# Altium PCB Relay Control PCB.PcbDoc
Units mil, origin at the board's own origin, x right, y up, seen from the top; angles counter-clockwise.
Board outline 2085 x 1860 mil, 2 copper layers (Top Layer, Bottom Layer); 11 components, 8 nets, 27 pads, 0 vias.
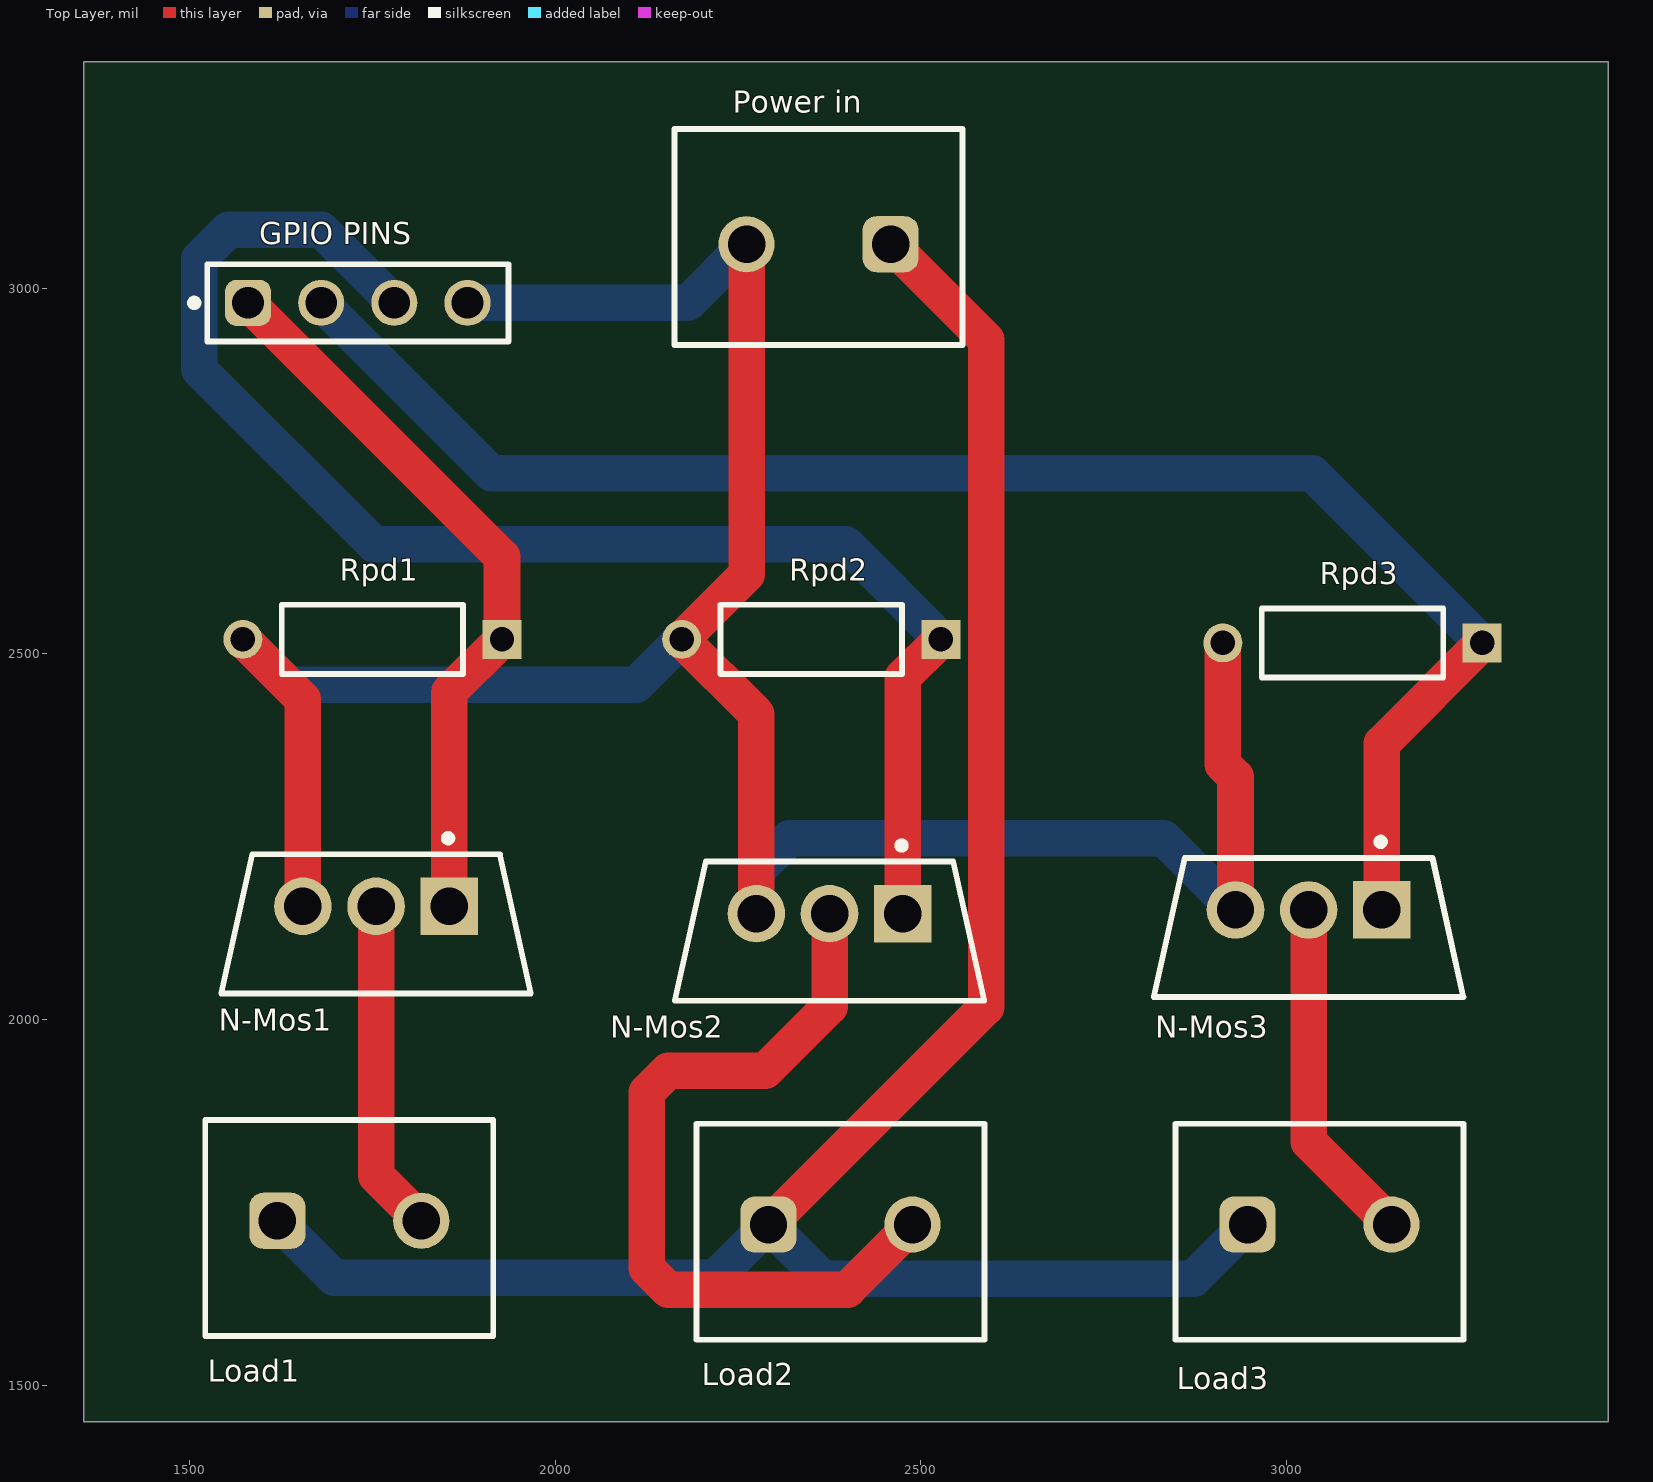
[diagram p0: Top Layer view]
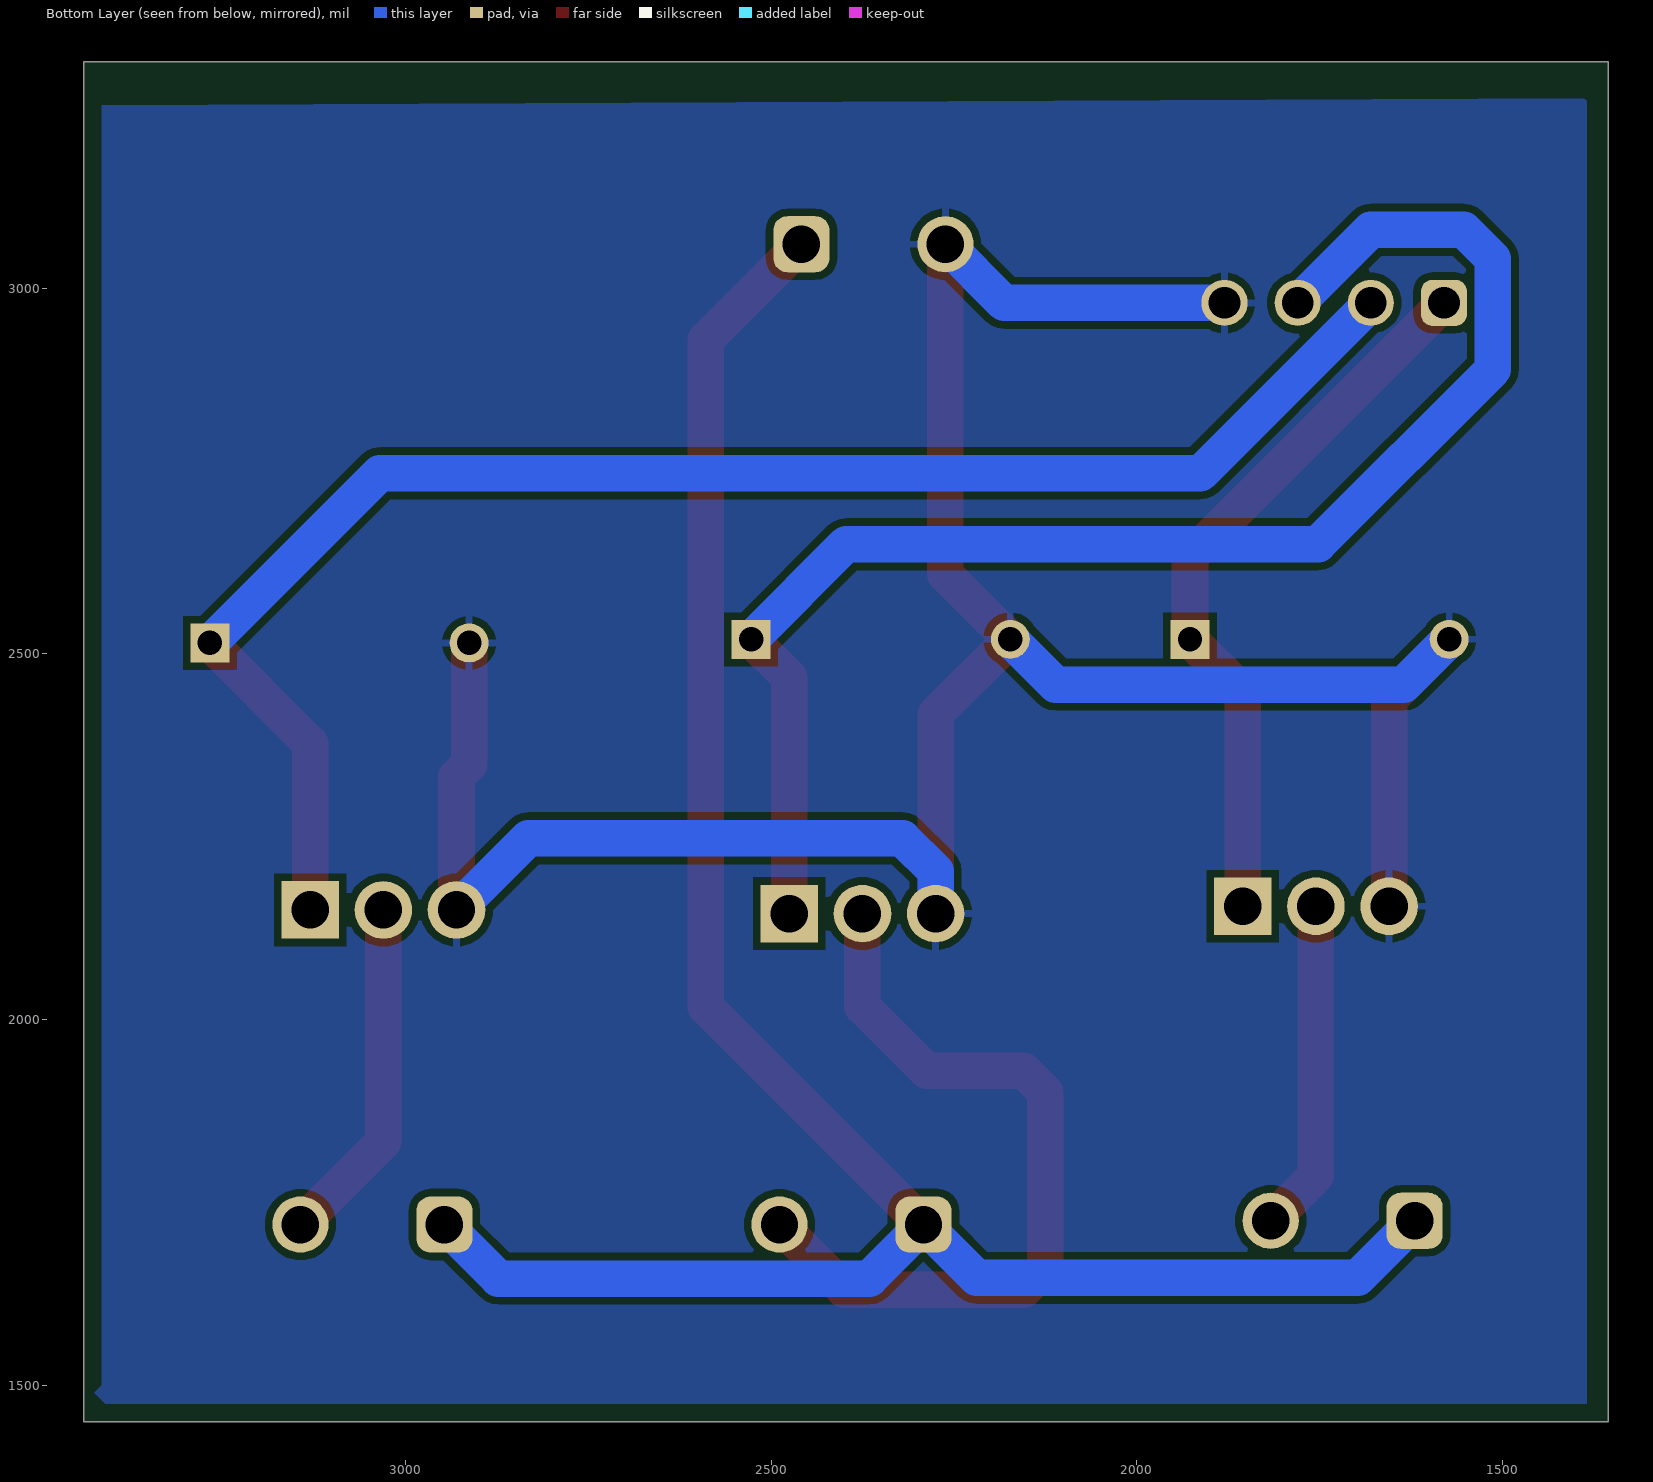
[diagram p1: Bottom Layer view, seen from below]
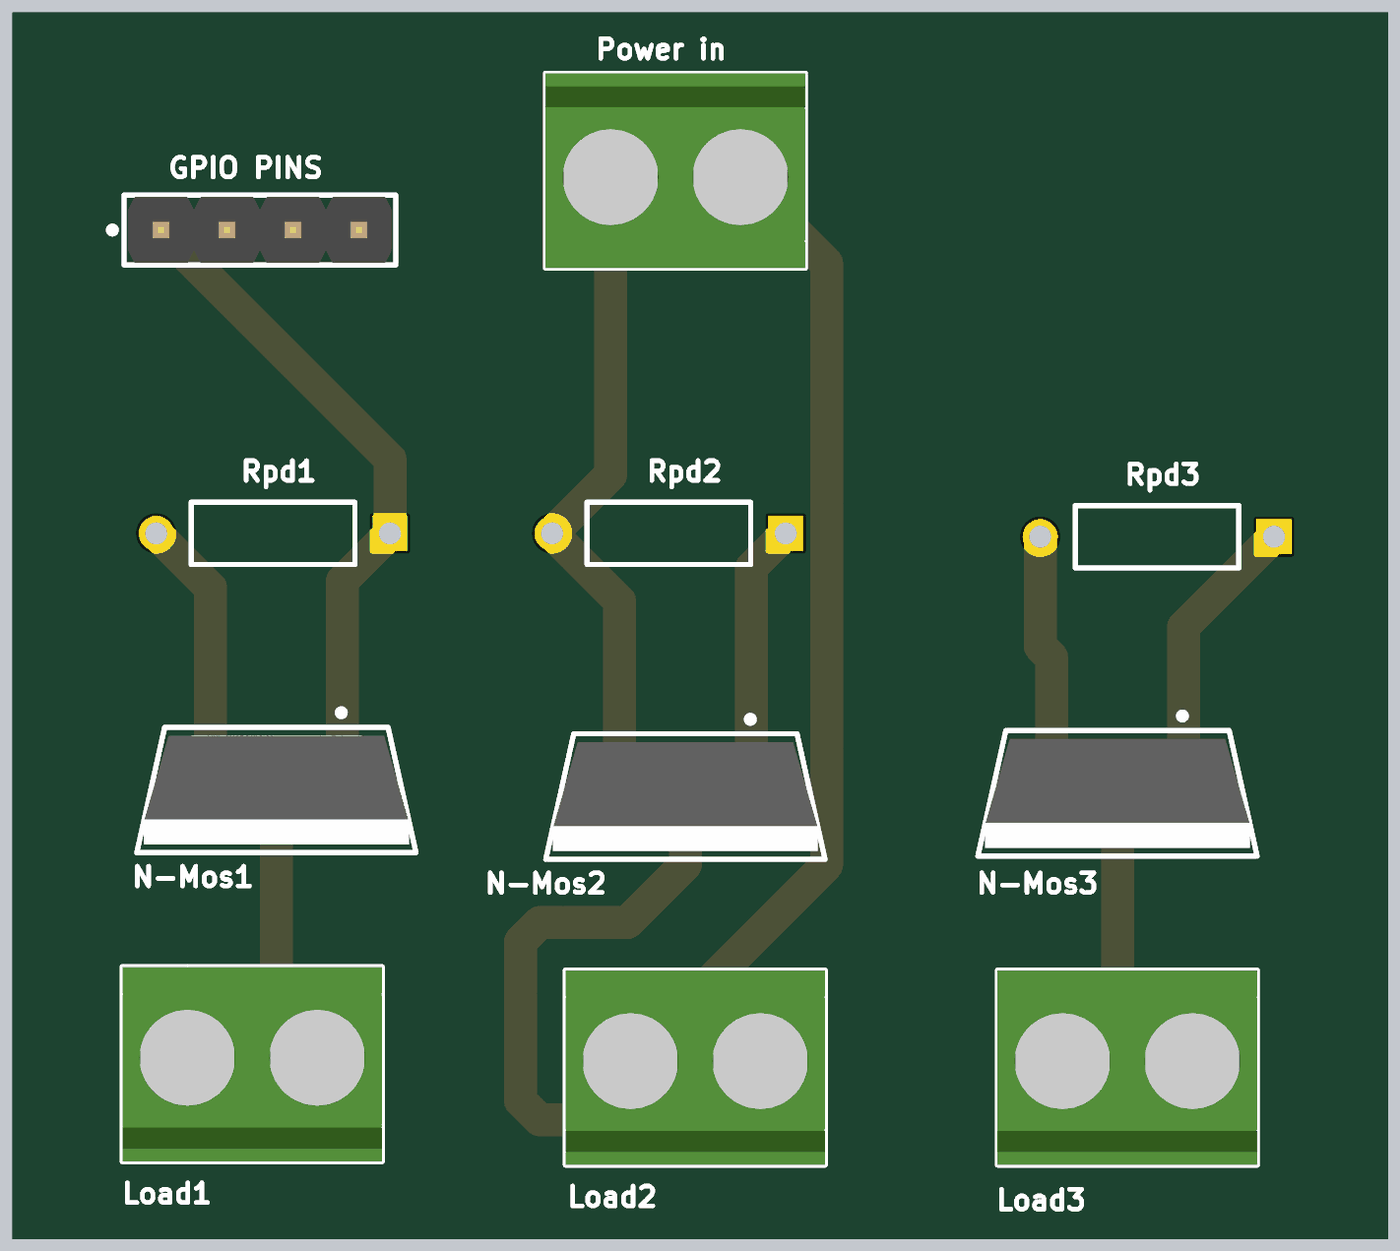
[diagram p2: 3D render of the assembled board from above, using the file's embedded part models]

## Layer stack, top to bottom
Top Solder: solder mask 0.4, Solder Resist, Dk 3.5
Top Layer: signal copper 1.4
Dielectric 1: dielectric 12.6, FR-4, Dk 4.8
Bottom Layer: signal copper 1.4
Bottom Solder: solder mask 0.4, Solder Resist, Dk 3.5

## Board outline
1355,1450 3440,1450 3440,3310 1355,3310

## Design rules (kind name [scope] priority, off if disabled: settings)
Clearance [All] p1: gap=10 ignorepadtopadclearanceinfootprint=FALSE
PolygonConnect [All] p1: connectstyle=Relief reliefconductorwidth=10 reliefentries=4 polygonreliefangle="90 Angle" airgapwidth=10
RoutingVias [All] p1: holewidth=28 width=50 viastyle="Through Hole" minholewidth=28 minwidth=50 maxholewidth=28 maxwidth=50
SolderMaskExpansion [All] p1: expansion=4 istentingtop=FALSE
SupplyNets "Schematic Supply Nets" [InNet('GND')] p1: voltage=0.000
Width [All] p1: maxlimit=50 minlimit=10 preferedwidth=50
30 further rules are at their usual default settings.

## Classes and differential pairs
component class "Relay control schematic": "GPIO PINS" Load1 Load2 Load3 N-Mos1 N-Mos2 N-Mos3 "Power in" Rpd2 Rpd3

## Components (designator, comment, footprint, x,y, rotation, side; value= is the part's Value field where it differs from the comment)
"GPIO PINS" "61300411121" 61300411121 1730,2980 r0 top (schematic designator P?)
Load1 "691137710002" 691137710002 1718.43,1715.16 r0 top
Load2 "691137710002" 691137710002 2390,1710 r0 top
Load3 "691137710002" 691137710002 3045,1710 r0 top
N-Mos1 "IRLB3813PBF" FP-PG-TO220-3-MFG 1755,2130.98 r270 top (schematic designator "N-Channel Mosfet1")
N-Mos2 "IRLB3813PBF" FP-PG-TO220-3-MFG 2375,2120.98 r270 top (schematic designator "N-Channel Mosfet2")
N-Mos3 "IRLB3813PBF" FP-PG-TO220-3-MFG 3030,2125.98 r270 top (schematic designator "N-Channel Mosfet3")
"Power in" "691137710002" 691137710002 2360,3070 r180 top
Rpd1 "MFR-25FBF5210K" RESA60-630X240 1750,2520 r180 top
Rpd2 "MFR-25FBF5210K" RESA60-630X240 2350,2520 r180 top
Rpd3 "MFR-25FBF5210K" RESA60-630X240 3090,2515 r180 top

## Footprints (in the part's own frame and the unit in brackets; to place one, negate y for a bottom-side part, rotate by r counter-clockwise, add the part's x,y. Pads: shape width x height; smd on the part's side, far side on the other; paste and mask are expansions set on the pad)
61300411121 [mm] "Pin Header, pitch 2.54 mm, THT, Vertical, single row, 4p"
  rrect50% 1.6x1.6 hole 1.1: 1(-3.81,0)
  round 1.6 hole 1.1: 2(-1.27,0) 3(1.27,0) 4(3.81,0)
  silkscreen extent -5.8,-1.34 5.23,1.34, body extent -5.08,-1.27 5.08,1.27, height 8.57
691137710002 [mm] "Horizontal Cable Entry with Pressure Clamp, pitch 5mm, 02p"
  rrect50% 1.95x1.95 hole 1.3: 1(-2.5,0.25)
  round 1.95 hole 1.3: 2(2.5,0.25)
  silkscreen extent -5,-3.75 5,3.75, body extent -5,-3.75 5,3.75, height 11.6
FP-PG-TO220-3-MFG [mm]
  rect 2x2 hole 1.3 paste-2539.97 mask+0: 1(-0.61,2.54)
  round 2 hole 1.3 paste-2539.97 mask+0: 2(-0.61,0) 3(-0.61,-2.54)
  silkscreen extent -3.1,-5.37 2.41,5.37, body extent -2.52,-5.48 2.51,5.48, height 0.25
RESA60-630X240 [mm] "Axial Resistor, 2-Leads, Dia 2.4mm, Body Length 6.3mm"
  rect 1.35x1.35 hole 0.85: 1(-4.5,0)
  round 1.35 hole 0.85: 2(4.5,0)
  silkscreen extent -3.15,-1.2 3.15,1.2, body extent -3.15,-1.2 3.15,1.2, height 2.4

## Part data
"GPIO PINS": library part CMP-1502-01064-3, Color=Black, Contact Resistance=20mΩ, Current Rating=3A, Max Operating Temperature=105°C, Min Operating Temperature=-40°C, Operating Supply Voltage=250V, Connector Type="Male Pin", Contact Material=Copper, Contact Mating Length=5.9944mm, Contact Plating=Gold, Gender=Male, Height=8.89mm, Lead Free="Lead Free", Lead Pitch=2.54mm, Mount="Through Hole", NexarPartId=32855522, Number of Contacts=4, Number of Pins=4, Number of Positions=4, Number of Rows=1, Orientation=Vertical, Packaging=Bulk, Pitch=2.54mm, REACH SVHC=Unknown, RoHS=Compliant, Termination=Solder, Voltage Rating=250V
Load1 Load2 Load3 "Power in": library part CMP-1502-03324-2, Current Rating=16A, Max Operating Temperature=120°C, Min Operating Temperature=-30°C, Voltage Rating=300V, Contact Material="Nickel, Tin", Height=11.6mm, Lead Pitch=5mm, NexarPartId=78871135, Number of Contacts=2, Number of Pins=2, Number of Rows=1, Packaging=Box, RoHS=Non-Compliant
N-Mos1 N-Mos2 N-Mos3: library part CMP-32901-000118-1, "MOSFET N-CH 30V 260A TO-220AB", Continuous Drain Current=260A, Drain To Source Breakdown Voltage=30V, Drain To Source Resistance=2mΩ, Gate To Source Voltage=20V, Input Capacitace At Vds="8420pF @ 15V", Manufacturer=Infineon, Max Forward Diode Voltage=1V, Max Junction Temp=+175°C, Package=PG-TO220-3, Power Dissipation=230W, Pulse Drain Current=1050A, Temperature="-55°C to +175°C", Temperature Range Low=-55°C, Automotive=No, Category=Trans, ComponentLink2Description=Datasheet, ComponentLink2URL=https://www.infineon.com/dgdl/irlb3813pbf.pdf?fileId=5546d462533600a4015356603cfe258b, Depletion Mode=False, Device Class L1="Discrete Semiconductors", Device Class L2=Transistors, Device Class L3=MOSFETs, Digikey Description="MOSFET N-CH 30V 260A TO-220AB", Drain To Source Voltage=30V, Footprint Url=https://www.infineon.com/dgdl/po-to220ab-fp.pdf?fileId=5546d462580663ef0158068cfbee01be, Gate Charge At Vgs="57nC @ 4.5V", Height=19.8mm, Lead Free=Yes, Manufacturer Part Number=IRLB3813PBF, Number Of Channels=1, Number Of N Channels=1, Octopart=https://octopart.com/irlb3813pbf-infineon-65874923, Reverse Recovery Charge=22nC, Reverse Recovery Time=24ns, RoHS=TRUE, Rthja Max=62°C/W, Standoff Height=3.37mm, Temperature Range High=+175°C, Threshold Vgs Max=2.35V, Threshold Vgs Min=1.35V, Turn Off Delay Time=33ns, Turn On Delay Time=36ns
Rpd1 Rpd2 Rpd3: library part CMP-1659-00074-2, "Axial Resistor, 10 KOhm, +/- 1%, 0.25 W, -55 to 155 degC, 2-Pin THD, RoHS, Bulk", Case\/Package=Axial, Manufacturer=Yageo, Max Operating Temperature=155degC, Max Power Dissipation=250mW, Min Operating Temperature=-55degC, Package Description="2-Pin Axial Lead, Dia 2.4 mm, Body Length 6.3 mm", Package Quantity=200, Package Reference=MFR-25, Resistance=10KOhm, Temperature Coefficient=100ppm\/degreesC, Tolerance=1%, Voltage Rating=250V, Voltage Rating (DC)=200V, Composition=MetalFilm, Datasheet URL=http://www.yageo.com/documents/recent/Yageo%20LR_MFR_2013.pdf, Datasheet Version=04/2013, Lead Free=LeadFree, Length=0.248inch, Manufacturer URL=http://www.yageo.com/, Military Standard=Not, Mount=ThroughHole, Mounting Technology=ThroughHole, Number of Terminations=2, Packaging=Bulk, Power Rating=250mW, RoHSCompliant=True, Termination=Axial

## Nets (pads, with @x,y where several pads share a name; then routed paths per layer and width w, separated by ;. In a path a pad name is that pad's centre, name@x,y a point inside that pad or via, vN(x,y) a via of type N, cw(c..) or ccw(c..) an arc to the next point about the centre after c; other vN are vias at no path point)
GND: "GPIO PINS.4" "Power in.2" N-Mos1.3 N-Mos2.3 N-Mos3.3 Rpd1.2 Rpd2.2 Rpd3.2 | length 3603.8
  Top Layer w50: Rpd1.2 1655,2437.83 N-Mos1.3 ; 2261.57,3060.16 2261.57,2608.74 Rpd2.2 2275,2417.83 N-Mos2.3 ; Rpd3.2 2912.83,2349.17 2930,2332 N-Mos3.3
  Bottom Layer w50: Rpd1.2 1634.83,2458 2110.83,2458 Rpd2.2 ; 1880,2980 2181.42,2980 2261.57,3060.16 ; N-Mos2.3 2275,2203 2320,2248 2832,2248 N-Mos3.3
NetLoad1_2: Load1.2 N-Mos1.2 | length 455.6
  Top Layer w50: N-Mos1.2 1755,1786.85 Load1.2
NetLoad2_2: Load2.2 N-Mos2.2 | length 1078.4
  Top Layer w50: N-Mos2.2 2375,2018 2287,1930 2154.29,1930 2125,1900.71 2125,1660.29 2154.29,1631 2399.58,1631 Load2.2
NetLoad3_2: Load3.2 N-Mos3.2 | length 477.1
  Top Layer w50: N-Mos3.2 3030,1833.27 Load3.2
"NetN-Channel Mosfet1_1": "GPIO PINS.1" N-Mos1.1 Rpd1.1 | length 998.7
  Top Layer w50: 1580,2980 1927.17,2632.83 Rpd1.1 1855,2447.83 N-Mos1.1
"NetN-Channel Mosfet2_1": "GPIO PINS.3" N-Mos2.1 Rpd2.1 | length 2039.6
  Top Layer w50: N-Mos2.1 2475,2467.83 Rpd2.1
  Bottom Layer w50: 1780,2980 1680,3080 1553,3080 1513,3040 1513,2889 1752,2650 2397.17,2650 Rpd2.1
"NetN-Channel Mosfet3_1": "GPIO PINS.2" N-Mos3.1 Rpd3.1 | length 2201.6
  Top Layer w50: N-Mos3.1 3130,2377.83 Rpd3.1
  Bottom Layer w50: 1680,2980 1913,2747 3035.17,2747 Rpd3.1
Vin: "Power in.1" Load1.1 Load2.1 Load3.1 | length 2967.8
  Top Layer w50: Load2.1 2589,2017.27 2589,2929.58 2458.43,3060.16
  Bottom Layer w50: Load1.1 1698,1647 2218.73,1647 Load2.1 2365.42,1646 2872.73,1646 Load3.1

## Polygon pours and split planes (outlines as drawn)
GND on Bottom Layer "NONET_L-01_P-001" (solid, pour order 2): 1385,3260 1385,1475 3410,1475 3425,1490 3415,1500 3415,3250